# EAGLE board Traffic Light Controller (EAGLE 9.6.2)
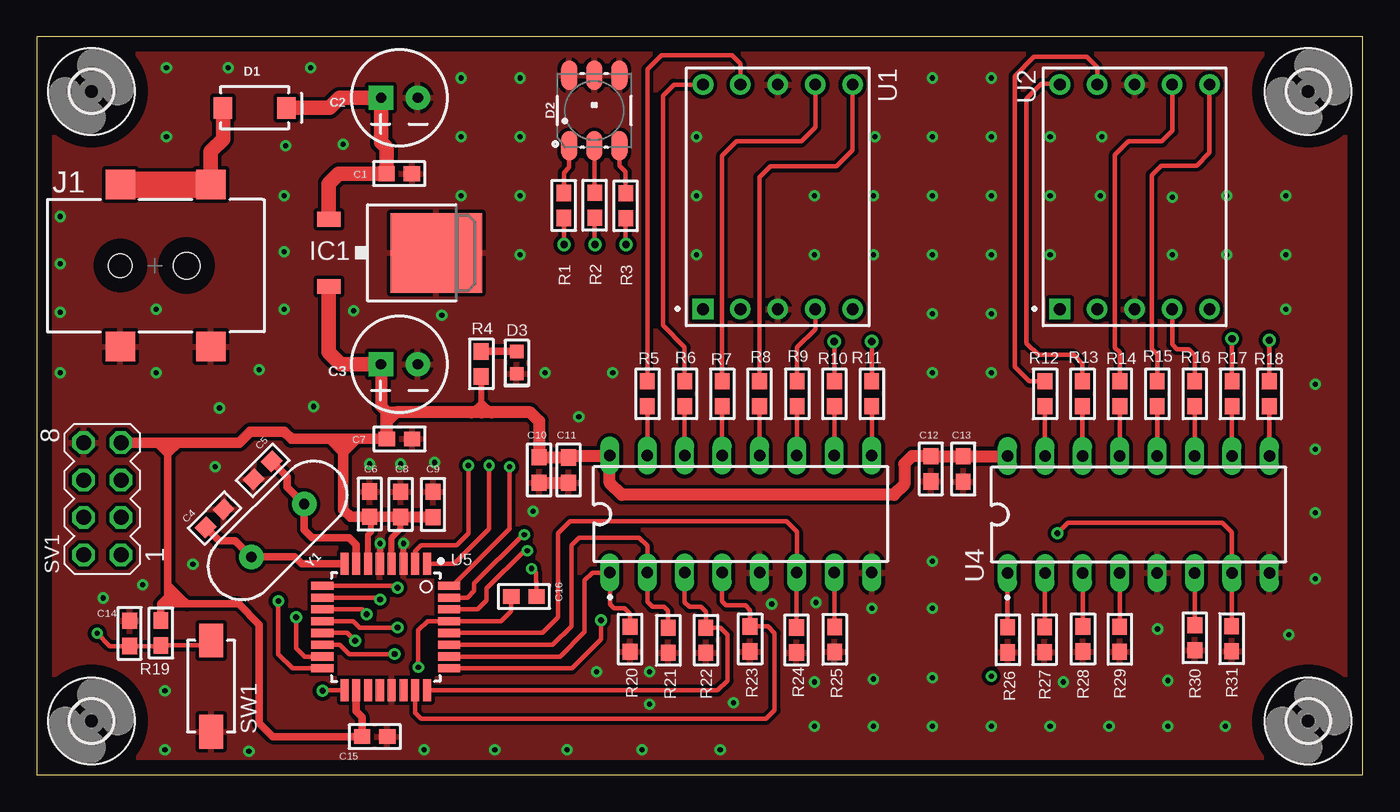
[diagram p0: board, top side]
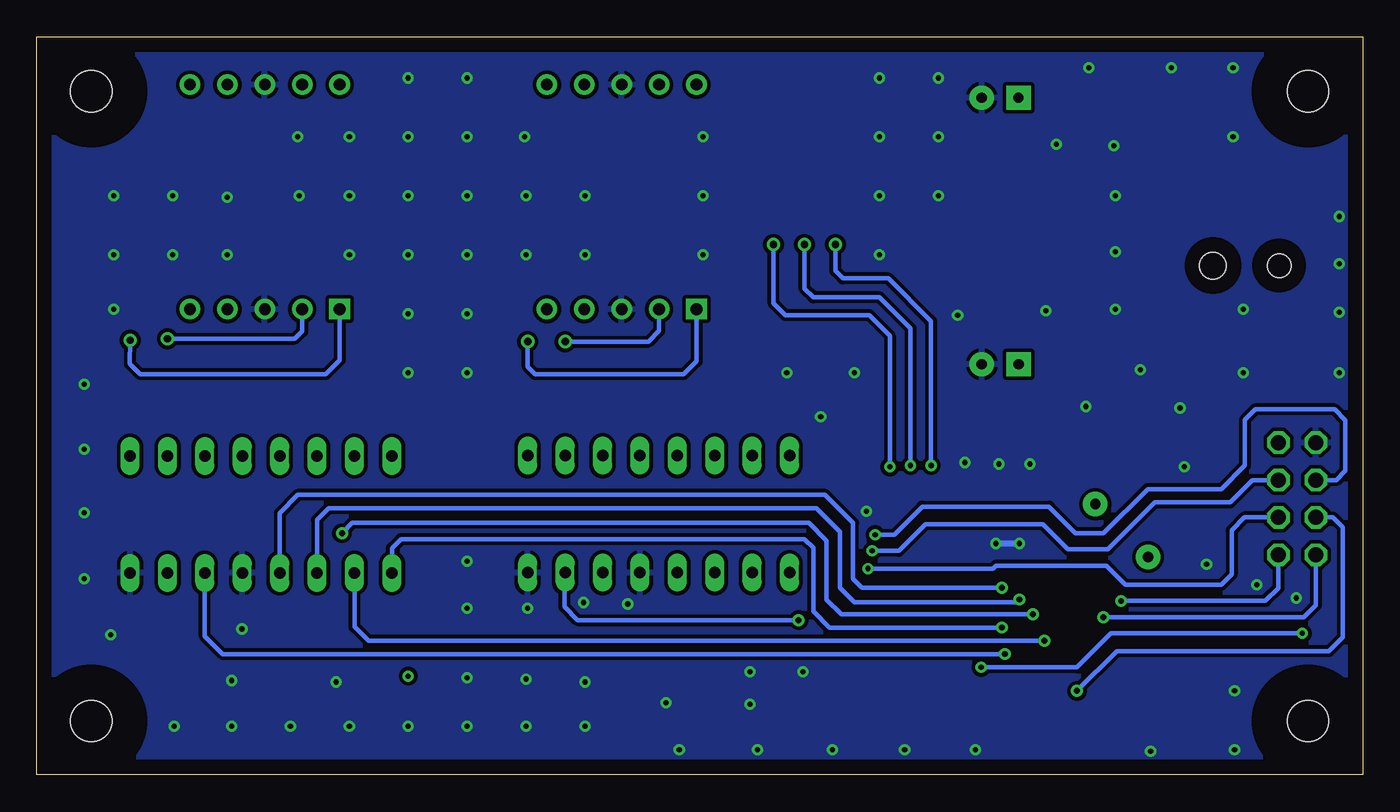
[diagram p1: board, bottom side, seen from below]

Size 90.02 x 50.09 mm. Coordinates in mm from the lower left corner, seen from the top.
Outline: 0,0 90.02,0 90.02,50.09 0,50.09 0,0
Copper layers (1*16): Top 0.035mm / dielectric 1.5mm / Bottom 0.035mm
Design rules "default": minimum track width 6mil, minimum drill 0.35mm, track to track 6mil, track to pad 6mil, pad to pad 6mil, via to via 6mil, smd to smd 6mil, copper to edge 40mil, drill to drill 6mil, minimum pad ring 10mil, minimum via ring 8mil, stop-mask expansion 4mil, vias tented up to drill 0mil, thermal gap 10mil

## Footprints (pad centres in the part's own frame; a part is rotated, then mirrored left to right if it is on the bottom)
C0603 = smd 1.1 x 1: 1 -0.909,0; 2 0.809,0
CPOL-RADIAL-2.5MM-6.5MM = drill 0.7 pad 1.651 square: 1 1.25,0 | drill 0.7 pad 1.651: 2 -1.25,0
SMA-DIODE = smd 1.27 x 1.47: A -2.15,0; C 2.15,0
LED-TRICOLOR-5050 = smd 2 x 1.1: 1 -2.4,1.7; 2 -2.4,0; 3 -2.4,-1.7; 4 2.4,-1.7; 5 2.4,0; 6 2.4,1.7
LEDC1608X65N = smd 0.91 x 0.93: A 0.76,0; C -0.76,0
2,8 = hole 2.8: 0,0
TO252 = smd 1 x 1.6: 1 -2.28,-4.8; 2 2.28,-4.8 | smd 5.4 x 6.2: 3 0,2.5
GCT_DCJ200-05-A-XX-X_REVA = smd 2 x 2: 1.1 -5.5,3.8; 1.2 -5.5,-2.35; 2 5.5,-2.35; 3 5.5,3.8 | hole 1.8: 0,2.15 | hole 1.6: 0,-2.35
R0603 = smd 1.1 x 1: 1 -0.85,0; 2 0.85,0
MA04-2 = drill 1.016 octagon: 1 -3.81,-1.27; 2 -3.81,1.27; 3 -1.27,-1.27; 4 -1.27,1.27; 5 1.27,-1.27; 6 1.27,1.27; 7 3.81,-1.27; 8 3.81,1.27
SW_1437566-3 = smd 2.3 x 1.6: 1 -3.08,0; 2 3.12,0
LED_SC52-11HWA = drill 0.8 pad 1.4 square: 1 -7.62,5.08 | drill 0.8 pad 1.4: 2 -7.62,2.54; 3 -7.62,0; 4 -7.62,-2.54; 5 -7.62,-5.08; 6 7.62,-5.08; 7 7.62,-2.54; 8 7.62,0; 9 7.62,2.54; 10 7.62,5.08
DIP794W45P254L1969H508Q16 = drill 0.78 pad 1.13 long: 1 -3.97,8.89; 2 -3.97,6.35; 3 -3.97,3.81; 4 -3.97,1.27; 5 -3.97,-1.27; 6 -3.97,-3.81; 7 -3.97,-6.35; 8 -3.97,-8.89; 9 3.97,-8.89; 10 3.97,-6.35; 11 3.97,-3.81; 12 3.97,-1.27; 13 3.97,1.27; 14 3.97,3.81; 15 3.97,6.35; 16 3.97,8.89
QFP80P900X900X120-32N = smd 1.5 x 0.55: 1 -4.3,2.8; 2 -4.3,2; 3 -4.3,1.2; 4 -4.3,0.4; 5 -4.3,-0.4; 6 -4.3,-1.2; 7 -4.3,-2; 8 -4.3,-2.8; 17 4.3,-2.8; 18 4.3,-2; 19 4.3,-1.2; 20 4.3,-0.4; 21 4.3,0.4; 22 4.3,1.2; 23 4.3,2; 24 4.3,2.8 | smd 0.55 x 1.5: 9 -2.8,-4.3; 10 -2,-4.3; 11 -1.2,-4.3; 12 -0.4,-4.3; 13 0.4,-4.3; 14 1.2,-4.3; 15 2,-4.3; 16 2.8,-4.3; 25 2.8,4.3; 26 2,4.3; 27 1.2,4.3; 28 0.4,4.3; 29 -0.4,4.3; 30 -1.2,4.3; 31 -2,4.3; 32 -2.8,4.3
HC49US = drill 0.7 pad 1.651: 1 -2.54,0; 2 2.54,0

## Placement (x,y rotation side)
C1  0.1uF  [C0603]  24.56,40.8 180 top
C2  100uF  [CPOL-RADIAL-2.5MM-6.5MM]  24.62,45.95 180 top
C3  100uF  [CPOL-RADIAL-2.5MM-6.5MM]  24.61,27.87 180 top
C4  22pF  [C0603]  12.1,17.46 45 top
C5  22pF  [C0603]  15.3,20.63 225 top
C6  22uF  [C0603]  22.6,18.32 270 top
C7  0.1uF  [C0603]  24.57,22.8 180 top
C8  0.1uF  [C0603]  24.7,18.31 270 top
C9  0.1uF  [C0603]  26.9,18.3 270 top
C10  10uF  [C0603]  34.1,20.74 90 top
C11  0.1uF  [C0603]  36.1,20.73 90 top
C12  10uF  [C0603]  60.7,20.82 90 top
C13  0.1uF  [C0603]  62.9,20.81 90 top
C14  0.1uF  [C0603]  6.3,9.55 270 top
C15  0.1uF  [C0603]  22.89,2.6 180 top
C16  0.1uF  [C0603]  33.12,12.1 0 top
D1  1A/40V/500mV  [SMA-DIODE]  14.79,45.27 0 top
D2  RGB_LED  [LED-TRICOLOR-5050]  37.85,45.09 90 top
D3  LED  [LEDC1608X65N]  32.58,27.98 90 top
H1  MOUNT-HOLE2.8  [2,8]  3.71,46.39 0 top
H2  MOUNT-HOLE2.8  [2,8]  86.32,46.39 0 top
H3  MOUNT-HOLE2.8  [2,8]  3.71,3.66 0 top
H4  MOUNT-HOLE2.8  [2,8]  86.32,3.66 0 top
IC1  7805DT  [TO252]  24.62,35.43 270 top
J1  DC_Power_Jack  [GCT_DCJ200-05-A-XX-X_REVA]  8.02,34.56 270 top
R1  2K  [R0603]  35.78,38.64 90 top
R2  2K  [R0603]  37.88,38.66 90 top
R3  2K  [R0603]  39.98,38.62 90 top
R4  2K  [R0603]  30.17,27.89 270 top
R5  330R  [R0603]  41.45,25.86 270 top
R6  330R  [R0603]  43.99,25.86 270 top
R7  330R  [R0603]  46.53,25.86 270 top
R8  330R  [R0603]  49.06,25.86 270 top
R9  330R  [R0603]  51.62,25.86 270 top
R10  330R  [R0603]  54.15,25.86 270 top
R11  330R  [R0603]  56.69,25.86 270 top
R12  330R  [R0603]  68.45,25.86 270 top
R13  330R  [R0603]  70.99,25.86 270 top
R14  330R  [R0603]  73.53,25.86 270 top
R15  330R  [R0603]  76.07,25.86 270 top
R16  330R  [R0603]  78.61,25.86 270 top
R17  330R  [R0603]  81.15,25.86 270 top
R18  330R  [R0603]  83.68,25.86 270 top
R19  10K  [R0603]  8.43,9.63 90 top
R20  1K  [R0603]  40.27,9.21 270 top
R21  1K  [R0603]  42.87,9.13 270 top
R22  1K  [R0603]  45.42,9.14 270 top
R23  1K  [R0603]  48.42,9.22 270 top
R24  1K  [R0603]  51.57,9.15 270 top
R25  1K  [R0603]  54.17,9.19 270 top
R26  1K  [R0603]  65.92,9.16 270 top
R27  1K  [R0603]  68.42,9.18 270 top
R28  1K  [R0603]  71.02,9.22 270 top
R29  1K  [R0603]  73.52,9.2 270 top
R30  1K  [R0603]  78.62,9.3 270 top
R31  1K  [R0603]  81.12,9.24 270 top
SV1  DEBUG/PROG  [MA04-2]  4.45,18.74 90 top
SW1  switch  [SW_1437566-3]  11.84,6 90 top
U1  SSD1  [LED_SC52-11HWA]  50.31,39.23 90 top
U2  SSD2  [LED_SC52-11HWA]  74.54,39.23 90 top
U3  CD4511BE  [DIP794W45P254L1969H508Q16]  47.8,17.7 90 top
U4  CD4511BE  [DIP794W45P254L1969H508Q16]  74.8,17.67 90 top
U5  ATMEGA328-AU  [QFP80P900X900X120-32N]  23.69,10.03 270 top
Y1  16MHz  [HC49US]  16.36,16.58 225 top

## Library data of the parts
C1 C4-C16 = PC_Capacitor_0603; AVAILABILITY: Good; DESCRIPTION: 0.1µF ±10% 50V Ceramic Capacitor X7R 0603 (1608 Metric); MF: TDK; MP: CGA3E2X7R1H104K080AA; PACKAGE: 1608 TDK; PRICE: None; PURCHASE-URL: https://pricing.snapeda.com/search/part/CGA3E2X7R1H104K080AA/?ref=eda
C2 C3 = SparkFun-Capacitors; PROD_ID: CAP-08439
D1 = SparkFun-DiscreteSemi; PROD_ID: DIO-08053
D2 = SparkFun-LED; PROD_ID: DIO-10298
D3 = PC_LED_0603; AVAILABILITY: Warning; DESCRIPTION: White LED Indication - Discrete 3.1V 0603 (1608 Metric); MF: Lite-On; MP: LTW-C191TLA; PACKAGE: 0603 Lite-On; PRICE: None; PURCHASE-URL: https://pricing.snapeda.com/search/part/LTW-C191TLA/?ref=eda
H1-H4 = holes
IC1 = linear 2
J1 = PC_CON_DC_Power_Jack; AVAILABILITY: Warning; DESCRIPTION: Power Barrel Connector Jack 2.05mm ID (0.081), 5.50mm OD (0.217) Surface Mount, Right Angle; MF: Global Connector Technology; MP: DCJ200-05-A-K1-A; PACKAGE: None; PRICE: None; PURCHASE-URL: https://pricing.snapeda.com/search/part/DCJ200-05-A-K1-A/?ref=eda
R1-R31 = PC_Resistor_0603; MF: Yageo; RESISTOR: 0603
SV1 = con-lstb; OC_FARNELL: unknown; OC_NEWARK: unknown
SW1 = PC_Switch_1437566-3; AVAILABILITY: Good; COMMENT: 1437566-3; CONFIGURATION_POLE-THROW: Single Pole - Single Throw; CONTACT_CURRENT_RATING: 50 mA; DESCRIPTION: Tactile Switch SPST-NO Top Actuated Surface Mount; MF: TE Connectivity; MP: 1437566-3; PACKAGE: None; PRICE: None
U1 U2 = PC_LED-7-SegmentDisplay; AVAILABILITY: Not in stock; DESCRIPTION: Display: LED; single 7-segment; 13.2mm; red; 0.9-2.2mcd; MF: Kingbright; MP: SC52-11HWA; PACKAGE: None; PRICE: None
U3 U4 = PC_IC_CD4511BE; AVAILABILITY: In Stock; DESCRIPTION: CMOS BCD-to-7-Segment LED Latch Decoder Drivers 16-PDIP -55 to 125; MF: Texas Instruments; MP: CD4511BE; PACKAGE: PDIP-16 Texas Instruments; PRICE: None; PURCHASE-URL: https://pricing.snapeda.com/search/part/CD4511BE/?ref=eda
U5 = KC_IC_ATMEGA328-AU; AVAILABILITY: In Stock; DESCRIPTION: AVR AVR® ATmega Microcontroller IC 8-Bit 20MHz 32KB (16K x 16) FLASH 32-TQFP (7x7); MF: Microchip; MP: ATMEGA328-AU; PACKAGE: TQFP-32 Microchip; PRICE: None; PURCHASE-URL: https://pricing.snapeda.com/search/part/ATMEGA328-AU/?ref=eda
Y1 = SparkFun-Clocks; PROD_ID: XTAL-08181; SF_ID: COM-00536

## Nets
+5V: C3.1 C6.2 C7.2 C8.2 C9.2 C10.2 C11.2 C12.2 C13.2 C15.2 IC1.2 R4.2 R19.2 SV1.7 U3.16 U4.16 U5.4 U5.6 U5.18
+12V: D1.A J1.1.1 J1.1.2
DEBUG_RX: SV1.5 U5.30
DEBUG_TX: SV1.6 U5.31
GND: C1.1 C2.2 C3.2 C4.2 C5.2 C6.1 C7.1 C8.1 C9.1 C10.1 C11.1 C12.1 C13.1 C14.1 C15.1 D2.4 D2.5 D2.6 D3.C IC1.3 J1.2 J1.3 R20.2 R21.2 R22.2 R23.2 R24.2 R25.2 R26.2 R27.2 R28.2 R29.2 R30.2 R31.2 SV1.8 SW1.1 U1.3 U1.8 U2.3 U2.8 U3.5 U3.8 U4.5 U4.8 U5.3 U5.5 U5.21
LED_BLUE: R3.1 U5.32
LED_GREEN: R1.1 U5.2
LED_RED: R2.1 U5.1
MISO: SV1.1 U5.16
MOSI: SV1.2 U5.15
N$1: C1.2 C2.1 D1.C IC1.1
N$2: D3.A R4.1
N$3: C5.1 U5.7 Y1.1
N$4: R7.1 U1.7
N$5: C4.1 U5.8 Y1.2
N$6: C14.2 C16.1 R19.1 SW1.2 U5.29
N$7: R7.2 U3.13
N$8: R8.2 U3.12
N$9: R9.2 U3.11
N$10: R10.2 U3.10
N$11: R11.2 U3.9
N$12: R5.2 U3.15
N$13: R6.2 U3.14
N$14: R8.1 U1.6
N$15: R9.1 U1.4
N$16: R10.1 U1.2
N$17: R11.1 U1.1
N$18: R5.1 U1.9
N$19: R6.1 U1.10
N$20: R14.2 U4.13
N$21: R15.2 U4.12
N$22: R16.2 U4.11
N$23: R17.2 U4.10
N$24: R18.2 U4.9
N$25: R12.2 U4.15
N$26: R13.2 U4.14
N$27: R14.1 U2.7
N$28: R15.1 U2.6
N$29: R16.1 U2.4
N$30: R17.1 U2.2
N$31: R18.1 U2.1
N$32: R12.1 U2.9
N$33: R13.1 U2.10
N$34: D2.3 R3.2
N$35: D2.1 R1.2
N$36: D2.2 R2.2
RESET: C16.2 SV1.3
SCK: SV1.4 U5.17
SSD1_A: R25.1 U3.7 U5.25
SSD1_B: R20.1 U3.1 U5.26
SSD1_BL: R23.1 U3.4 U5.23
SSD1_C: R21.1 U3.2 U5.27
SSD1_D: R24.1 U3.6 U5.28
SSD1_DT: R22.1 U3.3 U5.24
SSD2_A: R31.1 U4.7 U5.11
SSD2_B: R26.1 U4.1 U5.12
SSD2_BL: R29.1 U4.4 U5.9
SSD2_C: R27.1 U4.2 U5.13
SSD2_D: R30.1 U4.6 U5.14
SSD2_DT: R28.1 U4.3 U5.10

## Tracks (layer width: path | path; a pad name or v marks a point on that pad's centre or on a via)
+5V
  Top 0.4: R4.2 30.17,25.33 | 30.17,25.27 30.17,24.63 30.2,24.6 | 30.17,25.33 30.17,25.27 | 30.17,25.27 29.5,24.6 | 30.17,25.33 30.9,24.6 | U5.6 22.49,16.29 22.7,16.5 22.7,17.41 | U5.4 24.09,16.09 24.7,16.7 C8.2
  Top 0.5: 22.7,17.41 C6.2 | 8.9,21.75 8.9,22.55 8.1,22.55 8.9,21.75 | 8.9,21.75 8.9,12.9 | 8.9,12.9 9.7,12.1 | 9.7,12.1 10.2,11.6 | 10.2,11.6 13.7,11.6 15.1,10.2 15.1,3.5 16,2.6 C15.2 22.08,3.92 21.69,4.31 U5.18 | 8.9,21.75 9.7,22.55 | 8.9,12.9 8.9,12.1 | 8.9,12.1 8.4,11.6 8.4,11.4 | 8.4,11.4 8.4,10.51 R19.2 | 8.9,12.1 9.7,12.1 | 10.2,11.6 8.6,11.6 8.4,11.4
  Top 0.7: 20.8,22.8 19.9,22.8 | 19.9,22.8 17.3,22.8 16.8,23.3 14.5,23.3 13.75,22.55 9.7,22.55 8.1,22.55 SV1.7 | C8.2 26.49,17.5 | 20.8,21.9 20.8,18 21.29,17.51 C6.2 C8.2 | 20.8,21.9 20.8,22.8 | 20.8,21.9 21.7,22.8 C7.2 20.8,22.8 | 19.9,22.8 20.8,21.9 | C9.2 C8.2
  Top 0.8: C3.1 23.36,25.04 23.76,24.64 | 23.76,24.64 23.8,24.6 | 23.8,22.84 23.8,24 | 23.8,24 23.8,24.6 | C11.2 C10.2 34.1,24 33.5,24.6 30.9,24.6 30.2,24.6 29.5,24.6 24.4,24.6 | 23.8,24.6 24.4,24.6 | 24.4,24.6 23.8,24 | C13.2 | U4.16 62.92,21.64 C13.2 | C13.2 C12.2 59.43,21.63 58.9,21.1 58.9,19.7 58.2,19 39.7,19 38.9,19.8 U3.16 | U3.16 | C11.2 36.22,21.66 U3.16 | C7.2 23.76,24.64
  Top 1: IC1.2 19.82,28.68 20.63,27.87 C3.1 | C11.2 | 60.71,21.62 C12.2
+12V
  Top 1: J1.1.1 11.82,42.32 12.64,43.14 D1.A
  Top 1.8: J1.1.2 J1.1.1
DEBUG_RX  (via drill 0.35)
  Top 0.3: U5.30 29.93,11.23 30.55,11.85 30.55,12.65
  Top 0.305: v33.3,15.2 33.1,15.2 30.55,12.65
  Bottom 0.3: 17.3,15.3 20,15.3 21.7,17 29.7,17 31.5,15.2 v33.3,15.2
  Bottom 0.305: 17.3,15.3 14.1,18.5 9,18.5 7.49,20.01 SV1.5
DEBUG_TX  (via drill 0.35)
  Top 0.3: U5.31 29.23,12.03 29.7,12.5 29.7,13
  Top 0.305: v33.1,16.3 33,16.3 29.7,13
  Bottom 0.3: 17.6,16.4 19.5,16.4 21.3,18.2 29.9,18.2 31.8,16.3 v33.1,16.3
  Bottom 0.305: 17.6,16.4 14.6,19.4 9.6,19.4 8,21 8,24.1 7.3,24.8 1.9,24.8 1.17,24.07 1.17,20.63 1.8,20 SV1.6
GND  (via drill 0.35)
  Top 0.4: U5.3 v24.89,15.69 v24.9,15.7 | v23.3,15.7 U5.5
  Top 0.8: C10.1 C11.1
  Bottom 0.4: v23.3,15.7 v24.9,15.7
  other vias: 8.8,48 16.8,39.3 8.8,43.3 20.8,42.8 28.8,47.3 28.8,43.3 32.8,47.3 32.8,43.3 32.8,39.3 32.8,35.3 15.1,27.5 8.1,27.3 8.7,1.7 52.8,35.3 52.8,39.3 56.8,39.3 56.8,35.3 60.8,47.3 60.8,43.3 60.8,39.3 60.8,35.3 60.8,31.3 60.8,27.3 68.8,43.3 68.8,39.3 68.8,35.3 44.8,43.3 44.8,39.3 44.8,35.3 80.8,39.3 80.8,35.3 84.8,39.3 84.8,35.3 60.8,11.3 52.8,3.3 56.8,3.3 60.8,3.3 64.8,3.3 68.8,3.3 72.8,3.3 76.8,3.3 47.3,4.9 38,7 49.9,11.6 52.9,11.7 56.7,11.3 27,21.2 12.1,20.9 39.1,27.3 34.5,27.3 36.8,24.3 27.5,31.2 24.7,21.1 22.6,21.1 14.4,1.6 26.3,1.7 31.1,1.7 36,1.7 41.1,1.7 46.4,1.7 56.8,6.5 60.8,6.6 64.8,39.3 64.8,43.3 64.8,35.3 64.8,31.3 72.3,43.3 72.2,39.3 77.1,39.2 56.9,43.3 64.8,47.3 64.8,27.3 86.8,26.5 84.8,31.6 86.8,22.1 86.8,17.8 86.8,13.3 85,9.5 16.8,35.5 12.4,24.9 1.6,27.3 18.8,25 16.8,31.6 33.7,17.9 1.6,34.7 10.6,14.3 8.7,5.7 4.5,12 7.2,12.9 21.5,31.5 8.1,31.6 13,48 18.6,48 16.9,42.7 60.8,14.5 76.8,6.4 76.1,9.9 80.7,3.3 1.6,31.4 77.1,35.3 1.6,37.9 41.6,4.8 41.6,7 52.8,6.3 69.7,6.3 28.8,39.3
  pour Top (isolate 0.254): -4.1,52.3 93.2,52.3 93.2,-3.5 -4.4,-3.5 -4.4,52
  pour Bottom (isolate 0.254): -2.5,52 91.9,52 92,52.1 92,-1.9 92.1,-2 -2.4,-2 -2.5,-2.1
LED_BLUE  (via drill 0.35, 0.5)
  Top 0.3: R3.1 39.98,36.02 v40,36 | U5.32 28.23,12.83 32.1,16.7 v32.1,20.9
  Bottom 0.3: v32.1,20.9 32.1,29.8 33.5,31.2 39.2,31.2 40,32 v40,36
LED_GREEN  (via drill 0.35, 0.5)
  Top 0.3: U5.2 25.69,15.19 26.1,15.6 28.5,15.6 29.3,16.4 v29.3,21 | R1.1 35.8,37.77 v35.8,36
  Bottom 0.3: v29.3,21 29.3,30.8 32.2,33.7 35.3,33.7 35.8,34.2 v35.8,36
LED_RED  (via drill 0.35, 0.5)
  Top 0.3: U5.1 28.33,14.33 30.7,16.7 v30.7,21 | R2.1 37.88,36.02 v37.9,36
  Bottom 0.3: v30.7,21 30.7,30.3 32.8,32.4 37.3,32.4 37.9,33 v37.9,36
MISO  (via drill 0.4)
  Top 0.3: U5.16 17.37,7.23 16.4,8.2 v16.4,11.8
  Bottom 0.3: SV1.1 5.72,12.68 6.6,11.8 v16.4,11.8
MOSI  (via drill 0.4)
  Top 0.3: v17.6,10.7 17.6,8.6 18.2,8 19.36,8 U5.15
  Bottom 0.3: SV1.2 3.18,11.52 4,10.7 v17.6,10.7
N$1
  Top 1: D1.C 19.87,45.27 20.55,45.95 C2.1 23.37,42.93 23.75,42.55 C1.2 20.5,40.8 19.82,40.12 IC1.1
N$2
  Top 0.5: R4.1 D3.A
N$3
  Top 0.5: U5.7 21.69,15.61 21.2,16.1 18.7,16.1 18.16,16.64 Y1.1 17,19.53 17,20.22 C5.1
N$4
  Top 0.3: U1.7 52.85,43.95 51.9,43 47.5,43 46.53,42.03 R7.1
N$5
  Top 0.5: 20.86,14.3 U5.8 17.97,14.33 17.5,14.8 14.58,14.8 | 14.58,14.8 Y1.2 | C4.1 12.37,15.9 13.48,15.9 14.58,14.8
N$6  (via drill 0.35)
  Top 0.3: C16.1 32.21,11.11 31.53,10.43 U5.29 26.53,10.43 25.9,9.8 v25.9,7.3 | C14.2 4.96,8.74 v4.1,9.6 | R19.1 11.5,8.78 SW1.2
  Top 0.305: R19.1 8.39,8.74 C14.2
  Bottom 0.3: v4.1,9.6 17.1,9.6 19.4,7.3 v25.9,7.3
N$7
  Top 0.3: R7.2 U3.13
N$8
  Top 0.3: R8.2 U3.12
N$9
  Top 0.3: R9.2 U3.11
N$10
  Top 0.3: R10.2 U3.10
N$11
  Top 0.3: R11.2 U3.9
N$12
  Top 0.3: R5.2 U3.15
N$13
  Top 0.3: R6.2 U3.14
N$14
  Top 0.3: R8.1 49.06,40.56 49.8,41.3 54.3,41.3 55.39,42.39 U1.6
N$15
  Top 0.3: R9.1 51.62,29.02 52.85,30.25 U1.4
N$16  (via drill 0.5)
  Top 0.3: v54.15,29.4 v54.15,29.39 R10.1
  Bottom 0.3: U1.2 47.77,30.13 48.5,29.4 v54.15,29.4
N$17  (via drill 0.5)
  Top 0.3: v56.69,29.4 R11.1
  Bottom 0.3: U1.1 45.23,28.07 46.1,27.2 56.2,27.2 56.7,27.7 v56.7,29.39 v56.69,29.4
N$18
  Top 0.3: R5.1 41.45,47.87 42.4,48.82 47.2,48.82 47.77,48.25 U1.9
N$19
  Top 0.3: R6.1 43.99,29.01 42.5,30.5 42.5,46.1 43.25,46.85 U1.10
N$20
  Top 0.3: R14.2 U4.13
N$21
  Top 0.3: R15.2 U4.12
N$22
  Top 0.3: R16.2 U4.11
N$23
  Top 0.3: R17.2 U4.10
N$24
  Top 0.3: R18.2 U4.9
N$25
  Top 0.3: R12.2 U4.15
N$26
  Top 0.3: R13.2 U4.14
N$27
  Top 0.3: R14.1 73.53,28.67 73.2,29 73.2,42.1 74.1,43 76.4,43 77.1,43.7 77.1,46.83 U2.7
N$28
  Top 0.3: R15.1 76.07,28.53 75.7,28.9 75.7,40.7 76.35,41.35 78.75,41.35 79.62,42.22 U2.6
N$29
  Top 0.3: U2.4 77.08,29.22 77.4,28.9 78.2,28.9 78.61,28.49 R16.1
N$30  (via drill 0.5)
  Top 0.3: R17.1 v81.15,29.6
  Bottom 0.3: U2.2 72,30.1 72.5,29.6 v81.15,29.6
N$31  (via drill 0.5)
  Top 0.3: R18.1 v83.68,29.5
  Bottom 0.3: U2.1 69.46,28.14 70.4,27.2 83,27.2 83.7,27.9 v83.68,29.5
N$32
  Top 0.3: R12.1 67.39,26.71 66.4,27.7 66.4,47.42 67.7,48.72 71.3,48.72 72,48.02 U2.9
N$33
  Top 0.3: R13.1 70.99,27.91 70.4,28.5 68,28.5 67.2,29.3 67.2,45.9 68.2,46.9 69.41,46.9 U2.10
N$34
  Top 0.305: D2.3 39.55,41.35 39.98,40.92 R3.2
N$35
  Top 0.305: R1.2 35.78,40.88 36.15,41.25 D2.1
N$36
  Top 0.305: R2.2 37.88,42.66 D2.2
  Top 0.5: 37.85,39.54 R2.2
N$37  (via drill 0.35)
  other vias: 64.8,6.7
RESET  (via drill 0.35)
  Top 0.3: C16.2 33.93,13.07 33.9,13.1 33.9,13.7 v33.6,14
  Bottom 0.3: 17.4,14.2 24.9,14.2 25.1,14 v33.6,14
  Bottom 0.305: 17.4,14.2 16.1,12.9 9.6,12.9 8.9,13.6 8.9,16.6 8.03,17.47 SV1.3
SCK  (via drill 0.4)
  Top 0.3: v19.4,5.7 19.43,5.73 U5.17
  Bottom 0.3: SV1.4 2.04,17.47 1.37,16.8 1.37,9.33 2.3,8.4 16.7,8.4 v19.4,5.7
SSD1_A  (via drill 0.4)
  Top 0.3: U5.25 36.33,7.23 38.3,9.2 v38.3,10.5 | R25.1 54.17,13.71 U3.7
  Top 0.5: 54.15,10.06 R25.1
  Bottom 0.3: v38.3,10.5 53.3,10.5 54.2,11.4 54.2,13.68 U3.7
SSD1_B
  Top 0.3: U5.26 35.53,8.03 37.2,9.7 37.2,13.2 37.73,13.73 U3.1 38.91,11.59 39.2,11.3 39.9,11.3 40.27,10.93 R20.1
SSD1_BL
  Top 0.3: U3.4 46.53,11.77 46.8,11.5 48.1,11.5 48.42,11.18 R23.1 49.63,10.07 50.1,9.6 50.1,4.4 49.5,3.8 26.1,3.8 25.69,4.21 U5.23
SSD1_C
  Top 0.3: U5.27 35.03,8.83 36.3,10.1 36.3,15.6 36.8,16.1 40.9,16.1 41.45,15.55 U3.2 41.45,11.75 41.8,11.4 42.6,11.4 42.87,11.13 R21.1
SSD1_D
  Top 0.3: U5.28 34.33,9.63 35.4,10.7 35.4,16.4 36.2,17.2 50.9,17.2 51.61,16.49 U3.6 51.57,13.69 R24.1
  Top 0.5: 51.61,10.04 R24.1
SSD1_DT
  Top 0.3: U3.3 43.99,11.71 44.3,11.4 45.1,11.4 45.42,11.08 R22.1 46.41,9.99 46.9,9.5 46.9,6.4 46.23,5.73 U5.24
SSD2_A  (via drill 0.4)
  Top 0.3: U5.11 22.07,11.23 v22.4,10.9 | R31.1 81.12,13.67 U4.7 81.15,16.45 80.5,17.1 70,17.1 v69.3,16.4
  Bottom 0.3: v22.4,10.9 35.4,10.9 36.4,11.9 36.4,15.9 37.6,17.1 68.6,17.1 v69.3,16.4
SSD2_B  (via drill 0.4)
  Top 0.3: U5.12 21.47,10.43 21.9,10 v24.5,10 | U4.1 R26.1
  Bottom 0.3: v24.5,10 36.2,10 37.3,11.1 37.3,15.4 37.9,16 65.3,16 65.91,15.39 U4.1
SSD2_BL  (via drill 0.4)
  Top 0.3: U5.9 24.27,12.83 24.4,12.7 v24.5,12.7 | R29.1 U4.4
  Bottom 0.3: v24.5,12.7 34,12.7 34.6,13.3 34.6,17.1 36.5,19 72.3,19 73.53,17.77 U4.4
SSD2_C  (via drill 0.4)
  Top 0.3: 19.42,9.6 U5.13 21.07,9.63 v21.6,9.1 | U4.2 68.45,10.06 R27.1
  Bottom 0.3: v21.6,9.1 67.5,9.1 68.45,10.05 U4.2
SSD2_D  (via drill 0.4)
  Top 0.3: U5.14 20.57,8.83 21.2,8.2 v24.3,8.2 | R30.1 U4.6
  Bottom 0.3: v24.3,8.2 77.4,8.2 78.61,9.41 U4.6
SSD2_DT  (via drill 0.4)
  Top 0.3: R28.1 71.02,13.67 U4.3 | U5.10 23.17,12.03 v23.3,11.9
  Bottom 0.3: U4.3 70.99,17.31 70.2,18.1 37.1,18.1 35.5,16.5 35.5,12.7 34.5,11.7 23.5,11.7 v23.3,11.9